# EAGLE board Carte USB (EAGLE 7.2.0)
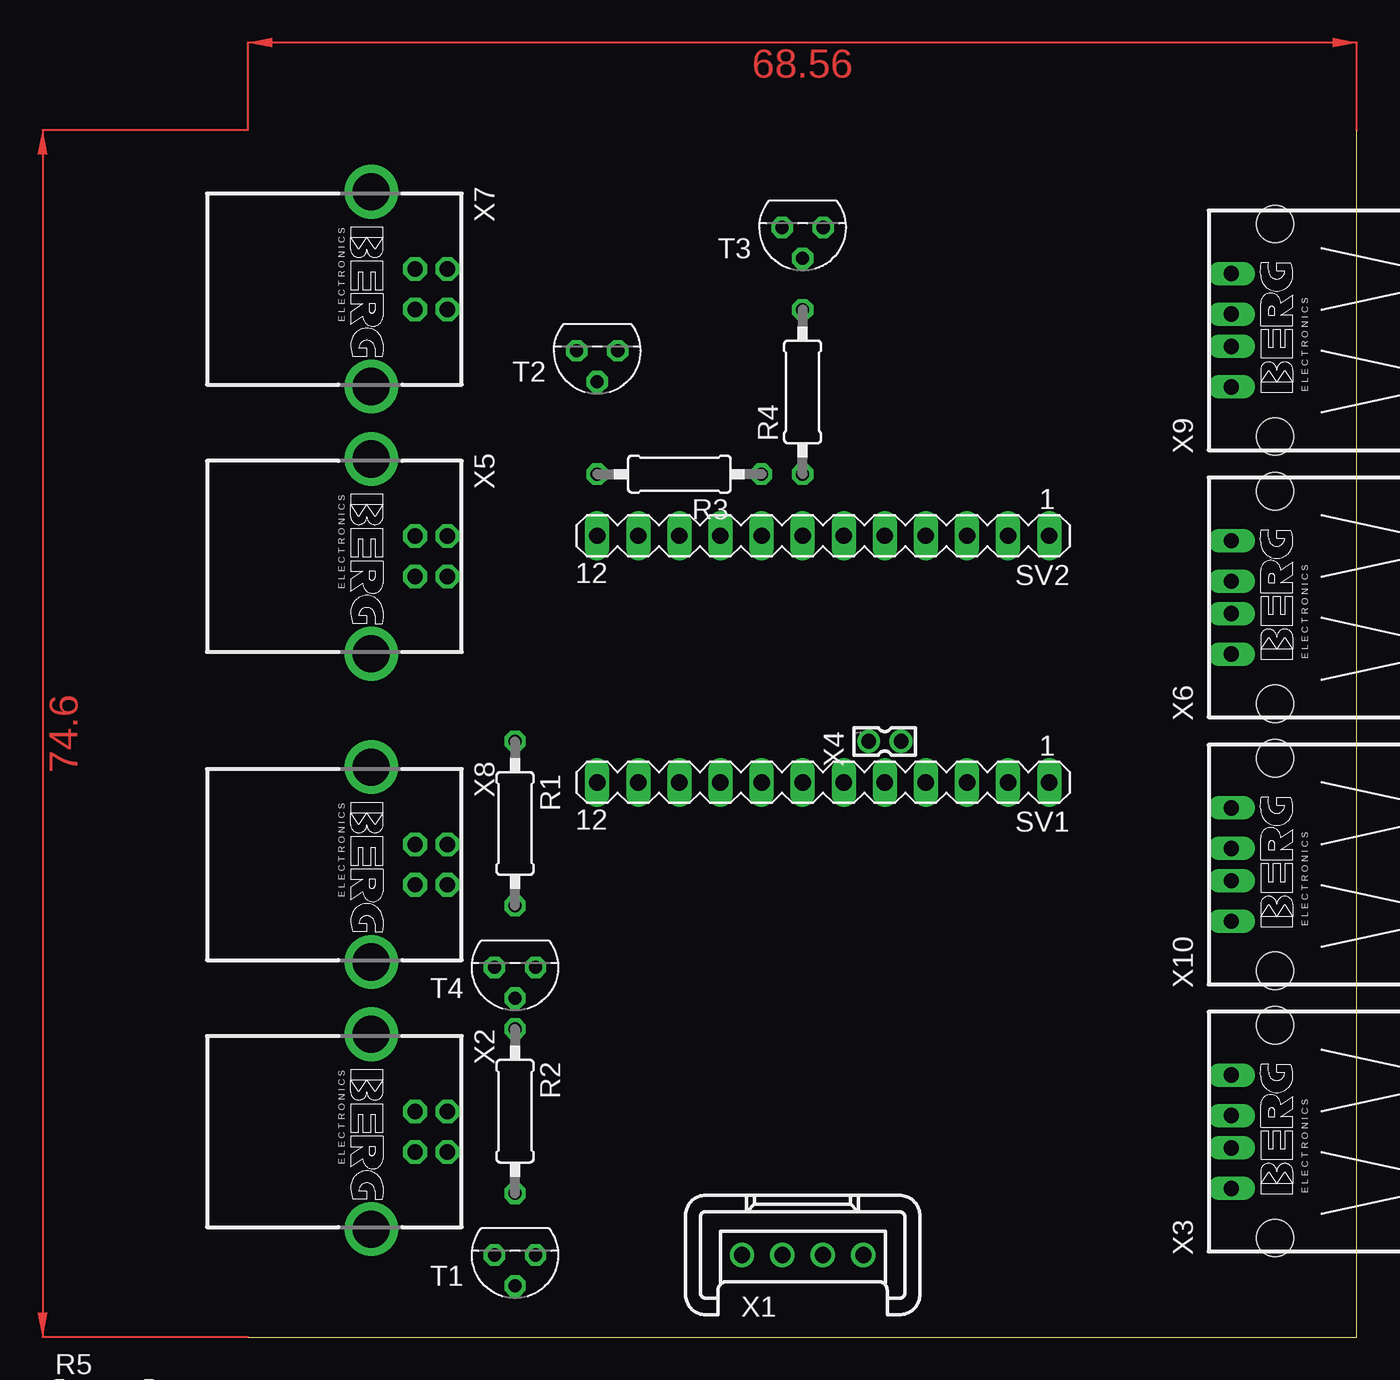
[diagram p0: board, top side]
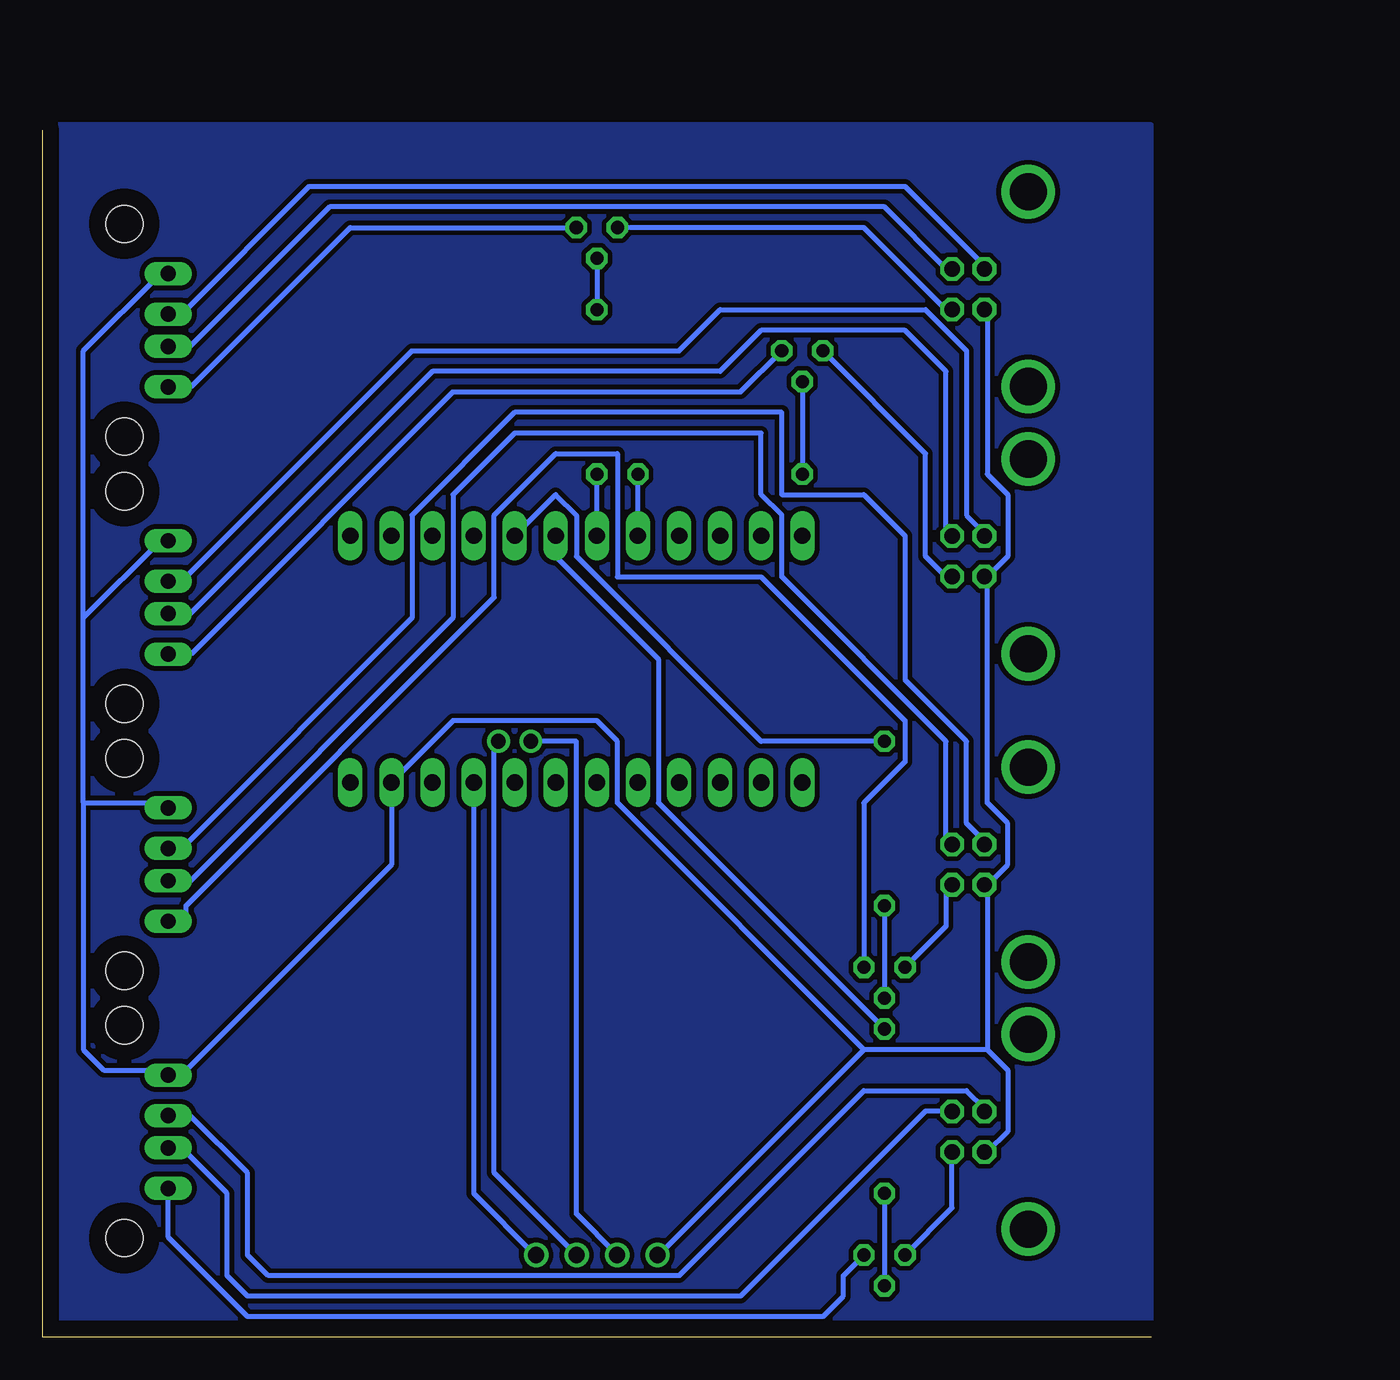
[diagram p1: board, bottom side, seen from below]

Size 68.56 x 74.6 mm. Coordinates in mm from the lower left corner, seen from the top.
Outline: 0,0 68.56,0 68.56,74.6
Copper layers (1*16): Top 0.035mm / dielectric 1.5mm / Bottom 0.035mm
Design rules "default": minimum track width 10mil, minimum drill 24mil, track to track 8mil, track to pad 8mil, pad to pad 8mil, via to via 8mil, smd to smd 8mil, copper to edge 40mil, drill to drill 8mil, minimum pad ring 10mil, minimum via ring 8mil, stop-mask expansion 4mil, vias tented up to drill 0mil, thermal gap 10mil
Net classes: 0 default: width 0.3 mm

## Footprints (pad centres in the part's own frame; a part is rotated, then mirrored left to right if it is on the bottom)
0207/10 = drill 0.813 octagon: 1 -5.08,0; 2 5.08,0
MA12-1 = drill 1.016 long: 1 -13.97,0; 2 -11.43,0; 3 -8.89,0; 4 -6.35,0; 5 -3.81,0; 6 -1.27,0; 7 1.27,0; 8 3.81,0; 9 6.35,0; 10 8.89,0; 11 11.43,0; 12 13.97,0
TO92 = drill 0.813 octagon: 1 1.27,0; 2 0,1.905; 3 -1.27,0
MKS1854-6-0-404 = drill 1 pad 1.422: 1 -3.75,0; 2 -1.25,0; 3 1.25,0; 4 3.75,0
PN61729-S = drill 0.95 octagon: 1 1.25,4.71; 2 -1.25,4.71; 3 -1.25,2.71; 4 1.25,2.71 | drill 2.3 pad 2.9: S1 -6.02,0; S2 6.02,0
PN87520 = drill 0.95 long: 1 -3.5,2.71; 2 -1,2.71; 3 1,2.71; 4 3.5,2.71 | hole 2.3: -6.57,0; 6.57,0
87758-0216 = drill 0.9 pad 1.27: 1 0,-1; 2 0,1

## Placement (x,y rotation side)
R1  [0207/10]  16.51,31.75 270 top
R2  [0207/10]  16.51,13.97 270 top
R3  [0207/10]  26.67,53.34 180 top
R4  [0207/10]  34.29,58.42 90 top
R5  [0207/10]  -8.89,-3.81 0 top  (outside the outline)
R6  [0207/10]  -8.89,-8.89 0 top  (outside the outline)
R7  [0207/10]  -8.89,-13.97 0 top  (outside the outline)
SV1  [MA12-1]  35.56,34.29 180 top
SV2  [MA12-1]  35.56,49.53 180 top
T1  2N5088  [TO92]  16.51,5.08 180 top
T2  2N5088  [TO92]  21.59,60.96 180 top
T3  2N5088  [TO92]  34.29,68.58 180 top
T4  2N5088  [TO92]  16.51,22.86 180 top
X1  MKS1854-6-0-404  [MKS1854-6-0-404]  34.29,5.08 0 top
X2  PN61729-S  [PN61729-S]  7.62,12.7 270 top
X3  [PN87520]  63.5,12.7 90 top
X4  87758-0216  [87758-0216]  39.37,36.83 270 top
X5  PN61729-S  [PN61729-S]  7.62,48.26 270 top
X6  [PN87520]  63.5,45.72 90 top
X7  PN61729-S  [PN61729-S]  7.62,64.77 270 top
X8  PN61729-S  [PN61729-S]  7.62,29.21 270 top
X9  [PN87520]  63.5,62.23 90 top
X10  [PN87520]  63.5,29.21 90 top

## Library data of the parts
R1-R7 = rcl
SV1 SV2 = con-lstb; OC_FARNELL: unknown; OC_NEWARK: unknown
T1-T4 = transistor
X1 = con-stocko; OC_FARNELL: 1141862; OC_NEWARK: unknown
X2 X3 X5-X10 = con-berg; OC_FARNELL: unknown; OC_NEWARK: unknown
X4 = con-molex; MPN: 87758-0216; OC_FARNELL: unknown; OC_NEWARK: 94M1513

## Nets
N$1: X1.3 X4.2
N$2: X1.2 X4.1
N$3: T1.1 X2.1
N$4: X2.2 X3.2
N$5: SV1.4 X1.4
N$6: T2.1 X5.1
N$7: X2.3 X3.3
N$8: X5.3 X6.3
N$9: T2.3 X6.1
N$10: X5.2 X6.2
N$11: T3.1 X7.1
N$12: X7.2 X9.2
N$14: X7.3 X9.3
N$15: T4.1 X8.1
N$16: X8.2 X10.2
N$17: X8.3 X10.3
N$18: SV1.2 X1.1 X2.4 X3.4 X5.4 X6.4 X7.4 X8.4 X9.4 X10.4
N$20: T3.3 X9.1
N$21: T4.3 X10.1
N$22: R5.2 R6.2 R7.2
N$23: R5.1 R6.1 R7.1
N$25: T1.3 X3.1
N$26: R3.2 T2.2
N$27: R4.2 T3.2
N$28: R2.2 T1.2
N$29: R1.2 T4.2
N$30: R1.1 SV2.5
N$31: R2.1 SV2.6
N$32: R4.1 SV2.7
N$33: R3.1 SV2.8

## Tracks (layer width: path | path; a pad name or v marks a point on that pad's centre or on a via)
N$1
  Bottom 0.3: X4.2 40.64,36.83 40.64,10.16 35.56,5.08 X1.3
N$2
  Bottom 0.3: X4.1 35.56,36.83 35.56,7.62 33.02,5.08 X1.2
N$3
  Bottom 0.3: T1.1 12.33,7.99 X2.1
N$4
  Bottom 0.3: X2.2 12.7,13.97 13.97,13.97 25.4,2.54 55.88,2.54 57.15,3.81 57.15,8.89 59.96,11.7 X3.2
N$5
  Bottom 0.3: SV1.4 41.91,8.89 38.1,5.08 X1.4
N$6
  Bottom 0.3: T2.1 13.97,54.61 13.97,48.26 12.7,46.99 X5.1
N$7
  Bottom 0.3: X3.3 59.42,13.7 55.88,10.16 55.88,5.08 54.61,3.81 29.21,3.81 17.78,15.24 11.43,15.24 10.33,14.14 X2.3
N$8
  Bottom 0.3: X5.3 10.16,49.53 11.43,50.8 11.43,60.96 13.97,63.5 26.67,63.5 29.21,60.96 45.72,60.96 59.96,46.72 X6.3
N$9
  Bottom 0.3: T2.3 25.4,58.42 43.18,58.42 59.38,42.22 X6.1
N$10
  Bottom 0.3: X5.2 12.7,49.53 12.7,59.69 15.24,62.23 24.13,62.23 26.67,59.69 44.45,59.69 59.42,44.72 X6.2
N$11
  Bottom 0.3: T3.1 17.78,68.58 12.7,63.5 X7.1
N$12
  Bottom 0.3: X7.2 12.7,66.04 16.51,69.85 50.8,69.85 59.42,61.23 X9.2
N$14
  Bottom 0.3: X7.3 10.16,66.04 15.24,71.12 52.07,71.12 59.96,63.23 X9.3
N$15
  Bottom 0.3: T4.1 12.7,25.4 12.7,27.94 X8.1
N$16
  Bottom 0.3: X10.2 59.69,27.94 43.18,44.45 43.18,52.07 39.37,55.88 24.13,55.88 24.13,52.07 22.86,50.8 22.86,46.99 12.7,36.83 12.7,30.48 X8.2
N$17
  Bottom 0.3: X10.3 59.69,30.48 45.72,44.45 45.72,50.8 39.37,57.15 22.86,57.15 22.86,52.07 17.78,52.07 15.24,49.53 15.24,40.64 11.43,36.83 11.43,31.75 10.16,30.48 X8.3
N$18
  Bottom 0.3: 66.04,33.02 60.96,33.02 X10.4 | 66.04,33.02 66.04,44.45 | 66.04,44.45 66.04,60.96 61.27,65.73 X9.4 | 10.16,46.99 8.89,48.26 8.89,52.07 10.16,53.34 10.16,63.5 X7.4 | 10.16,17.78 8.89,16.51 8.89,12.7 10.14,11.45 X2.4 | 10.16,27.94 10.16,17.78 | 17.78,17.78 30.48,5.08 X1.1 | 10.16,17.78 17.78,17.78 | 10.16,46.99 10.16,33.02 8.89,31.75 8.89,29.21 10.16,27.94 | 10.16,46.99 X5.4 | 10.16,27.94 X8.4 | 17.78,17.78 33.02,33.02 33.02,36.83 34.29,38.1 43.18,38.1 SV1.2 46.99,29.21 60,16.2 X3.4 61.1,16.51 64.77,16.51 66.04,17.78 66.04,33.02 | 66.04,44.45 61.27,49.22 X6.4
N$19
  pour Bottom (isolate 0.3): 0,74.93 68.58,74.93 68.58,0 0,0
N$20
  Bottom 0.3: T3.3 49.53,68.58 59.38,58.73 X9.1
N$21
  Bottom 0.3: T4.3 17.78,33.02 15.24,35.56 15.24,38.1 24.13,46.99 33.02,46.99 33.02,54.61 36.83,54.61 40.64,50.8 40.64,45.72 59.69,26.67 59.69,25.4 X10.1
N$22  (2 unrouted)
N$23  (2 unrouted)
N$25
  Bottom 0.3: T1.3 19.05,3.81 19.05,2.54 20.32,1.27 55.88,1.27 60.79,6.18 X3.1
N$26
  Bottom 0.3: T2.2 R3.2
N$27
  Bottom 0.3: T3.2 R4.2
N$28
  Bottom 0.3: R2.2 T1.2
N$29
  Bottom 0.3: R1.2 T4.2
N$30
  Bottom 0.3: SV2.5 36.83,52.07 35.56,50.8 35.56,48.26 24.13,36.83 R1.1
N$31
  Bottom 0.3: R2.1 30.48,33.02 30.48,41.91 36.83,48.26 SV2.6
N$32
  Bottom 0.3: SV2.7 R4.1
N$33
  Bottom 0.3: SV2.8 R3.1
(copper drawn outside any net)
  shapes: Top area x2